# Altium PCB kernel.PcbDoc (part 6 of 7)
Units mil, origin at the board's own origin, x right, y up, seen from the top; angles counter-clockwise.
Board outline 2360 x 2450.34 mil, 6 copper layers (Top Layer, GND, SIGNAL, POWER, GND1, Bottom Layer), stack 32.112 mil thick; 150 components, 174 nets, 684 pads, 710 vias.
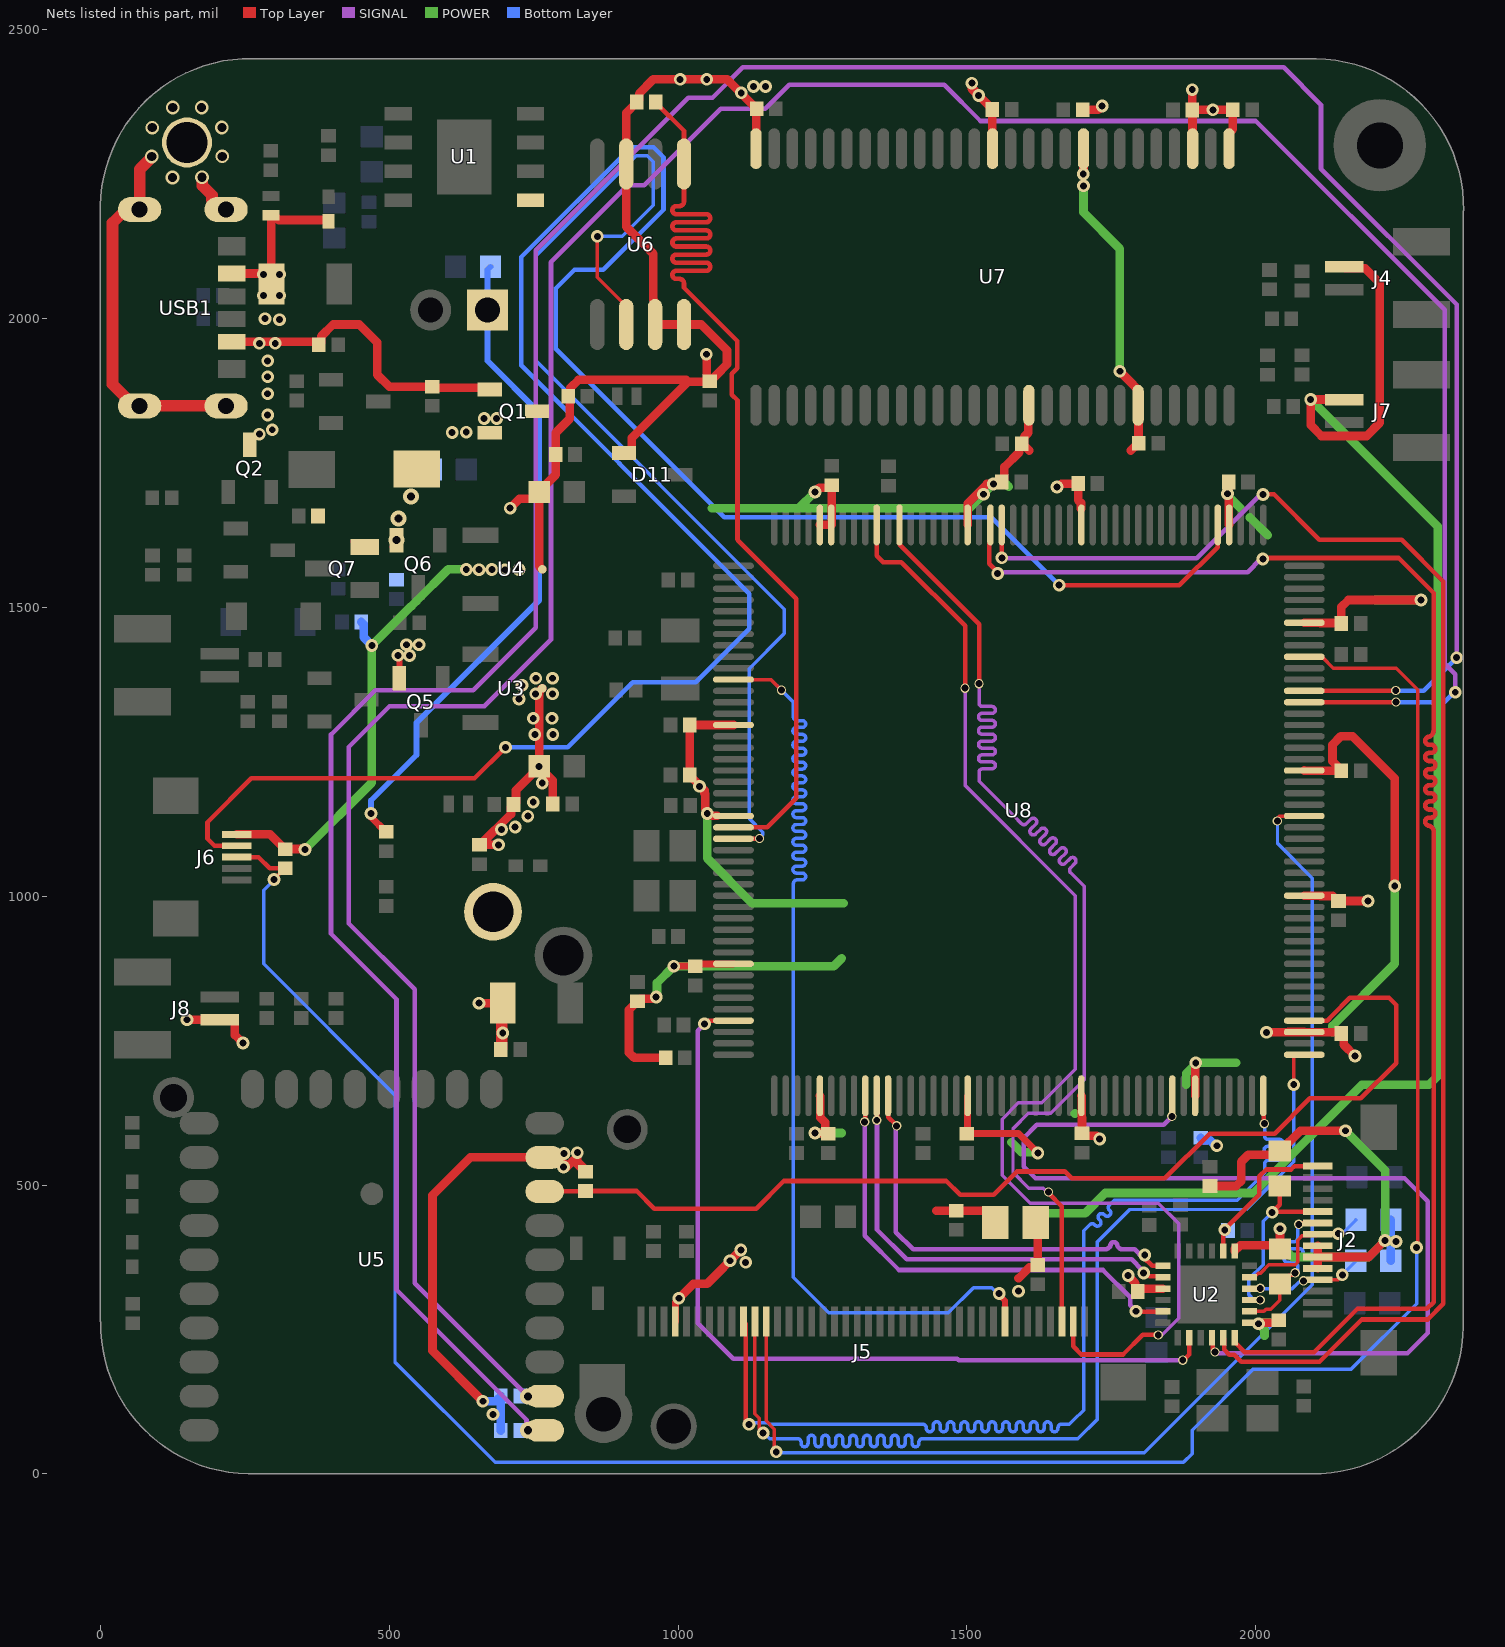
[diagram p9: the nets of this part, all layers, seen from the top]

## Via types
v1: diameter 22, hole 12, Top Layer to Bottom Layer, tented both sides, 583 vias
v2: diameter 16, hole 12, Top Layer to Bottom Layer, tented both sides, 111 vias
v3: diameter 23.62, hole 15.75, Top Layer to Bottom Layer, 8 vias
v4: diameter 28, hole 14, Top Layer to Bottom Layer, 5 vias
v5: diameter 22, hole 12, Top Layer to Bottom Layer, 3 vias

## Nets (pads, with @x,y where several pads share a name; then routed paths per layer and width w, separated by ;. In a path a pad name is that pad's centre, name@x,y a point inside that pad or via, vN(x,y) a via of type N, cw(c..) or ccw(c..) an arc to the next point about the centre after c; other vN are vias at no path point) (continued)
R5: J5.10 U8.88 | length 1951.3
  Top Layer w8: J5.10@1113.3,263.94 1117.09,260.16 1117.09,108.69 1117.17,108.61 1117.17,91.67 v1(1122.95,85.89) ; U8.88@2013.23,654.77 2013.81,654.19 2013.81,607.55 2015.18,606.18 v2@2015.18,605.1
  Bottom Layer w6: v1@1123.06,86 1125.94,88.88 1154.74,88.88 1157.62,86 1288.76,86 1423.76,86 cw(c1423.76,80) 1429.76,80 1429.76,78.92 ccw(c1435.76,78.92) 1441.76,78.92 1441.76,84.3 cw(c1447.76,84.3) 1453.76,84.3 1453.76,78.92 ccw(c1459.76,78.92) 1465.76,78.92 1465.76,84.3 cw(c1471.76,84.3) 1477.76,84.3 1477.76,78.92 ccw(c1483.76,78.92) 1489.76,78.92 1489.76,84.3 cw(c1495.76,84.3) 1501.76,84.3 1501.76,78.92 ccw(c1507.76,78.92) 1513.76,78.92 1513.76,84.3 cw(c1519.76,84.3) 1525.76,84.3 1525.76,78.92 ccw(c1531.76,78.92) 1537.76,78.92 1537.76,84.3 cw(c1543.76,84.3) 1549.76,84.3 1549.76,78.92 ccw(c1555.76,78.92) 1561.76,78.92 1561.76,84.3 cw(c1567.76,84.3) 1573.76,84.3 1573.76,78.92 ccw(c1579.76,78.92) 1585.76,78.92 1585.76,84.3 cw(c1591.76,84.3) 1597.76,84.3 1597.76,78.92 ccw(c1603.76,78.92) 1609.76,78.92 1609.76,84.3 cw(c1615.76,84.3) 1621.76,84.3 1621.76,78.92 ccw(c1627.76,78.92) 1633.76,78.92 1633.76,84.3 cw(c1639.76,84.3) 1645.76,84.3 1645.76,78.92 ccw(c1651.76,78.92) 1657.76,78.92 1657.76,80 cw(c1663.76,80) 1663.76,86 1677.56,86 1684.33,92.78 1702.06,110.51 1702.06,420.83 1712.67,431.44 cw(c1716.91,427.2) 1721.16,431.44 1721.88,430.71 ccw(c1726.13,434.96) 1730.37,430.71 ccw(c1726.13,434.96) 1730.37,439.2 1728.93,440.63 cw(c1733.18,444.88) 1737.42,449.12 1738.85,447.68 ccw(c1743.1,451.93) 1747.34,447.68 ccw(c1743.1,451.93) 1747.34,456.17 1746.61,456.9 cw(c1750.85,461.14) 1746.61,465.38 1753.36,472.13 1755.36,474.13 1968.17,474.13 2015.63,521.59 2015.63,522.05 2015.63,537.05 cw(c2021.63,537.05) 2021.63,543.05 2041.35,543.05 ccw(c2041.35,549.05) 2041.35,555.05 2020.63,555.05 cw(c2020.63,561.05) 2020.63,567.05 2041.35,567.05 ccw(c2041.35,573.05) 2041.35,579.05 2021.63,579.05 cw(c2021.63,585.05) 2015.63,585.05 2015.63,599.81 2015.63,604.65 v2@2015.18,605.1
  Bottom Layer w8: v1(1122.95,85.89) v1@1123.06,86
  other v2: 2014.93,606.43
R6: J5.11 U8.89 | length 1984
  Top Layer w6: J5.11@1132.99,263.94 1132.99,104.5 1140.95,96.54 1140.95,77.21 v1(1147.28,70.88) ; v1(2065.93,673.9) 2065.93,723.31 2068.25,725.63 U8.89@2084.09,725.63 2107.68,725.63 U8.89@2110,723.31
  Bottom Layer w6: v1(1147.28,70.88) 1149.12,70.88 1159.02,60.98 1192.05,60.98 1207.05,60.98 cw(c1207.05,54.98) 1213.05,54.98 1213.05,53 ccw(c1219.05,53) 1225.05,53 1225.05,60.98 cw(c1231.05,60.98) 1237.05,60.98 1237.05,53 ccw(c1243.05,53) 1249.05,53 1249.05,60.98 cw(c1255.05,60.98) 1261.05,60.98 1261.05,53 ccw(c1267.05,53) 1273.05,53 1273.05,60.98 cw(c1279.05,60.98) 1285.05,60.98 1285.05,53 ccw(c1291.05,53) 1297.05,53 1297.05,60.98 cw(c1303.05,60.98) 1309.05,60.98 1309.05,53 ccw(c1315.05,53) 1321.05,53 1321.05,60.98 cw(c1327.05,60.98) 1333.05,60.98 1333.05,53 ccw(c1339.05,53) 1345.05,53 1345.05,60.98 cw(c1351.05,60.98) 1357.05,60.98 1357.05,53 ccw(c1363.05,53) 1369.05,53 1369.05,60.98 cw(c1375.05,60.98) 1381.05,60.98 1381.05,53 ccw(c1387.05,53) 1393.05,53 1393.05,60.98 cw(c1399.05,60.98) 1405.05,60.98 1405.05,53 ccw(c1411.05,53) 1417.05,53 1417.05,54.98 cw(c1423.05,54.98) 1423.05,60.98 1448.66,60.98 1692.24,60.98 1725.4,94.14 1725.4,401.36 1781.8,457.77 1983.2,457.77 2065.93,540.5 v1(2065.93,673.9)
R7: J5.12 U8.110 | length 2161.7
  Top Layer w6: J5.12@1152.68,263.94 1152.68,91.76 1166.77,77.66 v1@1166.77,41.44 ; v2@2037.82,1130.17 2037.82,1134.71 2042.05,1138.94 2084,1138.94 U8.110@2084.09,1139.02
  Bottom Layer w6: v1@1166.77,41.44 1171.21,37 1807.46,37 2097.76,327.3 2097.76,1031.56 2037.82,1091.49 v2@2037.82,1130.17
  other v1: 1170.06,38.22
  other v2: 2037.57,1130.43
RMII_CRS_DV: U2.11 U8.53 | length 821.7
  Top Layer w8: v2@1323.4,609.33 1324.25,610.18 U8.53@1324.25,654.77 ; v1@1794.65,280.55 1838.6,280.55 U2.11@1839.42,281.38
  SIGNAL w8: v2@1323.4,609.33 1323.4,412.27 1382.6,353.07 1735.6,353.07 1782.89,305.78 1782.89,292.31 v1@1794.65,280.55
  other v1: 1792.97,281.57
  other v2: 1323.15,609.59
RMII_REF_CLK: U2.14 U8.41 | length 1485.9
  Top Layer w8: v1@1045,779.72 1045.61,779.11 1046.85,779.11 1052.43,784.69 U8.41@1095.91,784.69 ; v2@1874.04,196.72 1875.02,196.72 1884.99,206.69 U2.14@1884.99,235.81
  SIGNAL w8: v1@1045,778.34 1045,778.18 1034.24,767.42 1034.24,261.04 1095.63,199.65 1483.32,199.65 1486.25,196.72 v2@1874.04,196.72
  other v1: 1045.87,779.11
  other v2: 1873.79,196.97
RMII_RXD0: U2.8 U8.54 | length 761.4
  Top Layer w8: U8.54@1343.94,654.77 1344.47,654.24 1344.47,612.27 v2@1344.26,612.06 ; v1@1803.96,352.84 1805.04,352.84 1815.93,341.95 1837.91,341.95 U2.8@1839.42,340.44
  SIGNAL w8: v2@1344.26,612.06 1344.52,611.8 1344.52,563.83 1344.52,438.44 1344.52,422.82 1395.95,371.39 1785.41,371.39 v1@1803.96,352.84
  other v1: 1806.04,347.85
  other v2: 1344,612.32
RMII_RXD1: U2.7 U8.55 | length 740.5
  Top Layer w8: U8.55@1363.62,654.77 1364.2,654.19 1364.2,617.54 1376.44,605.3 v2@1376.44,602.91 ; v1@1803.96,375.47 1805.28,375.47 1820.64,360.12 U2.7@1839.42,360.12
  SIGNAL w8: v2@1376.44,602.91 1377.13,602.22 1377.13,564.44 1377.13,441.33 1377.13,418.65 1406.96,388.83 1718.67,388.83 1738.97,388.83 ccw(c1738.97,399.07) 1748.5,395.3 cw(c1754.5,395.32) 1760.5,395.32 ccw(c1770.03,399.07) 1770.03,388.83 1780.5,388.83 1784.5,388.83 1790.59,388.83 v1@1803.96,375.47
  other v1: 1808,379.17
  other v2: 1378.57,602.59
RMII_TX_EN: U2.16 U8.80 | length 1722.5
  Top Layer w8: v2@1851.99,617.57 1852.75,618.34 1852.75,621.04 1855.75,624.03 U8.80@1855.75,654.77 ; U2.16@1924.36,235.81 1925.77,234.39 1925.77,214.97 v2@1930,210.75
  SIGNAL w8: v2(1854.9,619.08) 1854.9,618.35 1840.82,604.28 1621.19,604.28 1598.52,581.6 1598.52,532.01 1618.9,511.62 2257.69,511.62 2297.59,471.72 2297.59,243.92 2262.87,209.2 1931.54,209.2 v2@1930,210.75
  other v2: 1929.75,211
RMII_TXD0: U2.17 U8.156 | length 2631.5
  Top Layer w8: U8.156@1560.47,1642.95 1560.24,1642.72 1560.24,1586.33 v1(1560.65,1585.92) ; U2.17@1944.05,235.81 1945.56,234.29 1945.56,215.43 1954.58,206.41 1962.64,206.41 1974.8,194.25 2110.46,194.25 2183.63,267.42 2297.71,267.42 2325,294.71 2325,1545 2252.55,1617.45 2110.11,1617.45 2031.8,1695.75 v1(2012.86,1695.75)
  SIGNAL w8: v1(1560.65,1585.92) 1564.08,1585.92 1565,1585 1898.14,1585 2008.89,1695.75 v1(2012.86,1695.75)
RMII_TXD1: U2.18 U8.157 | length 2633.5
  Top Layer w8: U8.157@1540.79,1642.95 1540.79,1612.21 1538.97,1610.39 1538.97,1575.43 1553.36,1561.04 v1(1553.36,1558.88) ; U2.18@1963.73,235.81 1965.24,234.29 1965.24,226.71 1981.19,210.77 2101,210.77 2176.22,285.99 2296.47,285.99 2308.05,297.56 2308.05,1110.22 2308.05,1114.22 ; v1(2012.32,1584.04) 2013.89,1585.6 2247.44,1585.6 2308.05,1524.99 2308.05,1316.95 2308.05,1287.38 cw(c2296.1,1287.33) 2300.51,1276.22 ccw(c2300.51,1269.22) 2300.51,1262.22 2304,1262.22 cw(c2304,1255.22) 2304,1248.22 2300.51,1248.22 ccw(c2300.51,1241.22) 2300.51,1234.22 2304,1234.22 cw(c2304,1227.22) 2304,1220.22 2300.51,1220.22 ccw(c2300.51,1213.22) 2300.51,1206.22 2304,1206.22 cw(c2304,1199.22) 2304,1192.22 2300.51,1192.22 ccw(c2300.51,1185.22) 2300.51,1178.22 2304,1178.22 cw(c2304,1171.22) 2304,1164.22 2300.51,1164.22 ccw(c2300.51,1157.22) 2300.51,1150.22 2304,1150.22 cw(c2304,1143.22) 2304,1136.22 2300.51,1136.22 ccw(c2300.51,1129.22) 2300.51,1122.22 ; 2300.54,1122.21 cw(c2296.56,1110.95) 2308.04,1114.26
  SIGNAL w8: v1(1553.36,1558.88) 1555.62,1561.14 1986.21,1561.14 2009.11,1584.04 v1(2012.32,1584.04)
SCK: U6.6 U8.25 | length 1912.8
  Top Layer w6: v1@860.3,2141.07 860.3,2071.69 910.3,2021.69 U6.6@910.3,1989.8
  Top Layer w8: U8.25@1095.91,1099.65 v2@1141.35,1099.65
  Bottom Layer w6: v1@861.78,2142.55 903.09,2142.55 956.96,2196.42 956.96,2271.77 946.87,2281.86 927.24,2281.86 755,2109.62 755,1926.48 1184.23,1497.26 1184.23,1454.99 1123.41,1394.17 1123.41,1134.67 1146.93,1111.14 1146.93,1106.17 1141.35,1100.58 v2@1141.35,1099.65
  other v1: 860.3,2142.55
  other v2: 1141.09,1099.91
SCL: J5.39 U8.167 | length 2124.8
  Top Layer w8: U8.167@1343.94,1642.95 1343.94,1589.56 1354.93,1578.57 1386.71,1578.57 1497.18,1468.09 v2@1497.18,1360 ; J5.39@1684.18,263.94 1684.18,220.78 1698.27,206.69 1770.27,206.69 1804.61,241.03 v2@1826.98,241.03
  SIGNAL w6: v2@1497.18,1360 1497.18,1191.77 1687.99,1000.96 1687.99,700.66 1629.73,642.4 1589.19,642.4 1561.05,614.27 1561.05,517.12 1609.73,468.44 1831.62,468.44 1866.56,433.5 1866.56,269.57 1838.02,241.03 v2@1826.98,241.03
  other v2: 1831.32,240.62 1496.93,1360.25
SDA: J5.38 U8.165 | length 2058.1
  Top Layer w8: U8.165@1383.31,1642.95 1383.89,1642.37 1383.89,1608.49 1521.15,1471.22 v2@1521.15,1367.84 ; v2@1641.82,485.63 1664.49,462.97 J5.38@1664.49,263.94
  SIGNAL w6: v2@1521.15,1367.84 1521.15,1355 1521.15,1334.67 ccw(c1527.15,1334.67) 1527.15,1328.67 1543.28,1328.67 cw(c1543.28,1322.67) 1543.28,1316.67 1526.15,1316.67 ccw(c1526.15,1310.67) 1526.15,1304.67 1543.28,1304.67 cw(c1543.28,1298.67) 1543.28,1292.67 1526.15,1292.67 ccw(c1526.15,1286.67) 1526.15,1280.67 1543.28,1280.67 cw(c1543.28,1274.67) 1543.28,1268.67 1526.15,1268.67 ccw(c1526.15,1262.67) 1526.15,1256.67 1543.28,1256.67 cw(c1543.28,1250.67) 1543.28,1244.67 1526.15,1244.67 ccw(c1526.15,1238.67) 1526.15,1232.67 1543.28,1232.67 cw(c1543.28,1226.67) 1543.28,1220.67 1527.15,1220.67 ccw(c1527.15,1214.67) 1521.15,1214.67 1521.15,1199.67 1521.15,1199.18 1581.19,1139.14 1594.68,1125.66 ccw(c1598.92,1129.9) 1603.16,1125.66 1610.86,1133.36 cw(c1615.11,1129.12) 1619.35,1133.36 cw(c1615.11,1129.12) 1619.35,1124.87 1610.94,1116.46 ccw(c1615.18,1112.22) 1610.94,1107.98 ccw(c1615.18,1112.22) 1619.42,1107.98 1627.83,1116.39 cw(c1632.08,1112.14) 1636.32,1107.9 1627.91,1099.49 ccw(c1632.15,1095.25) 1627.91,1091.01 ccw(c1632.15,1095.25) 1636.4,1091.01 1644.8,1099.42 cw(c1649.05,1095.17) 1653.29,1099.42 cw(c1649.05,1095.17) 1653.29,1090.93 1644.88,1082.52 ccw(c1649.12,1078.28) 1644.88,1074.04 ccw(c1649.12,1078.28) 1653.37,1074.04 1661.77,1082.45 cw(c1666.02,1078.2) 1670.26,1082.45 cw(c1666.02,1078.2) 1670.26,1073.96 1661.85,1065.55 ccw(c1666.09,1061.31) 1670.34,1057.07 1678.74,1065.48 cw(c1682.99,1061.23) 1687.23,1065.48 cw(c1682.99,1061.23) 1687.23,1056.99 1679.53,1049.29 ccw(c1683.77,1045.05) 1679.53,1040.8 1690.14,1030.2 1703.1,1017.23 1703.1,682.35 1645.08,624.33 1606.38,624.33 1579.92,597.87 1579.92,522.31 1607.35,494.88 1632.57,494.88 v2@1641.82,485.63
  other v2: 1641.42,487.92 1520.9,1368.09
SGND: M2固定孔.1 USB1.7 | length 725.6
  Top Layer w20: v3(88.98,2280.59) 88.98,2279.61 67.99,2258.62 USB1.7@67.99,2189.08 63.53,2184.62 39.86,2184.62 20.95,2165.71 20.95,1886.53 40.59,1866.89 58.55,1848.93 USB1.7@67.99,1848.93 USB1.7@217.6,1848.93 ; v3(175.98,2244.76) 176.67,2244.07 176.67,2230.01 193.2,2213.48 193.2,2206.09 210.21,2189.08 USB1.7@217.6,2189.08
  other v3: 124.8,2244.37 211.02,2280.98 89.76,2330.59 210.24,2330.98 125.2,2365.63 175.2,2365.63
SPEED: J2.14 R19.1 U2.2 | length 263.1
  Top Layer w8: U2.2@1944.05,386.01 1944.05,420.75 2006.44,483.14 2006.44,515.1 2018.31,526.98 2061.16,526.98 2067.14,532.95 J2.14@2107.24,532.95
  other v5: 1946.53,422.59
SPEEDA: 
SPEEDK: 
SPI_CS: R30.1 U6.1 U8.24 | length 1947.7
  Top Layer w8: R30.1@961.73,2375 961.73,2374.02 1010.3,2325.45 U6.1@1010.3,2267.76 1010.3,2220.36 1010.3,2202.86 cw(c1002.3,2202.86) 1002.3,2194.86 997.17,2194.86 ccw(c997.17,2187.86) 997.17,2180.86 1048.79,2180.86 cw(c1048.79,2173.86) 1048.79,2166.86 997.17,2166.86 ccw(c997.17,2159.86) 997.17,2152.86 1048.79,2152.86 cw(c1048.79,2145.86) 1048.79,2138.86 997.17,2138.86 ccw(c997.17,2131.86) 997.17,2124.86 1048.79,2124.86 cw(c1048.79,2117.86) 1048.79,2110.86 997.17,2110.86 ccw(c997.17,2103.86) 997.17,2096.86 1048.79,2096.86 cw(c1048.79,2089.86) 1048.79,2082.86 997.17,2082.86 ccw(c997.17,2075.86) 997.17,2068.86 1002.3,2068.86 cw(c1002.3,2060.86) 1010.3,2060.86 1010.3,2056.86 1010.3,2053.37 1102.35,1961.32 1102.35,1913.88 1093.21,1904.74 1093.21,1868.54 1102.91,1858.84 1102.91,1618.2 1103.3,1617.82 1103.3,1616.56 1141.34,1578.52 1204.8,1515.06 1204.8,1169.51 1154.63,1119.33 U8.24@1095.91,1119.33
SWDCLK: J6.2 U8.137 | length 4118.7
  Top Layer w8: J6.2@236.14,1087.53 197.48,1087.53 185.36,1099.65 185.36,1128.46 261.22,1204.32 647.73,1204.32 v1@700.54,1257.13 ; v1(1659.75,1538.57) 1663.83,1538.57 1664.01,1538.39 1867.97,1538.39 1934.17,1604.59 1934.17,1642.63 U8.137@1934.49,1642.95
  Bottom Layer w8: v1(701.19,1257.78) 809.09,1257.78 921.93,1370.63 1030.62,1370.63 1123.41,1463.42 1123.41,1523.96 1078.75,1568.61 898.64,1748.73 898.64,1749.23 728.88,1918.99 728.88,2106.68 919.06,2296.86 957.56,2296.86 974.8,2279.62 974.8,2188.43 870.84,2084.47 820.71,2084.47 788.42,2052.18 788.42,1947.69 1079.71,1656.4 1541.92,1656.4 v1(1659.75,1538.57)
SWDIO: J6.3 R45.2 U8.124 | length 4316.5
  Top Layer w6: v1(300.7,1029.22) 300.7,1029.95 R45.2@319.02,1048.27 ; U8.124@2084.09,1414.61 2114.84,1414.61 2134.53,1394.92 2243.05,1394.92 2280.72,1357.26 2280.72,1277.71 2280.51,1277.51 2280.51,680.31 2280.64,680.19 2280.64,394.14 v1(2278.59,392.08)
  Top Layer w8: J6.3@236.15,1067.84 273.73,1067.84 293.31,1048.27 R45.2@319.02,1048.27
  Bottom Layer w6: v1@300.7,1028.48 282.5,1010.28 282.5,883.01 510,655.51 510,193.66 683.66,20 1875.04,20 1890.04,35 1890.04,75.6 1996.02,181.57 2165.74,181.57 2278.68,294.52 2278.68,391.99 v1(2278.59,392.08)
TPRX_N: J2.4 R17.1 U2.22 | length 183.7
  Top Layer w6: v2@2078.57,333.9 2079,334.33 v2(2082.76,334.33) ; J2.4@2082.19,333.19 2104.33,333.19 J2.4@2107.24,336.1 2142.7,336.1 v1@2150,343.4
  Bottom Layer w6: v2(2007.9,321.35) 2008.88,320.36 2062.96,320.36 2074.74,332.13 ; v1@2150,343.4 v1(2150,344.64) 2173.31,367.95 R17.1@2173.31,368.93
TPRX_P: J2.8 R14.1 U2.23 | length 251.1
  Top Layer w6: U2.23@1989.62,340.44 1997.2,340.44 2004.37,347.6 2008.44,347.6 2022.9,362.07 2068.38,362.07 2072.65,366.34 2072.65,404.79 2079.79,411.93 2104.33,411.93 2107.43,415.03 v1@2143.99,415.03
  Bottom Layer w6: v1@2142,417.02 2143.99,415.03 2149.2,415.03 2173.43,439.27 R14.1@2173.43,440.25
  other v1: 2142.99,416.03
TPTX_N: J2.9 R9.1 U2.20 | length 337.2
  Top Layer w6: U2.20@1989.62,281.38 2014.4,281.38 2017.97,284.94 2026.42,284.94 2042.04,300.56 R9.1@2042.04,328.75 2057.15,343.86 2065.25,343.86 v2@2071.46,350.07 ; v2(2074.53,432.11) 2077.19,434.76 2107.01,434.76 J2.9@2107.24,434.53
  Bottom Layer w6: v2@2072.65,350.07 2072.65,357.09 2072.65,360.09 ccw(c2066.65,360.09) 2066.65,366.09 2055.11,366.09 cw(c2055.11,372.09) 2055.11,378.09 2076.03,378.09 ccw(c2076.03,384.09) 2076.03,390.09 2055.11,390.09 cw(c2055.11,396.09) 2055.11,402.09 2066.65,402.09 ccw(c2066.65,408.09) 2072.65,408.09 2072.65,420.86 2072.65,430.05 v2@2075.62,433.02
  other v2: 2068.35,348.2
TPTX_P: J2.10 R7.1 U2.21 | length 337.4
  Top Layer w6: U2.21@1989.62,301.07 1992.13,303.58 2007.77,303.58 v2(2007.77,300.97)
  Top Layer w8: R7.1@2041.74,498.67 2041.74,466.3 2026.89,451.44 2029.65,454.21 J2.10@2107.24,454.21
  Bottom Layer w6: v2(2007.77,300.97) 2007.06,301.67 1996.44,301.67 1988.38,309.74 1988.38,337.53 2013.19,362.35 2013.19,437.75 v1@2026.89,451.44
  other v1: 2028.54,452.83
VBAT: C6.2 J1.1 Q1.3 R52.2 U1.5 | length 1149.8
  Top Layer w12: v1(468.52,1143.39) 468.52,1137.23 494.02,1111.73 R52.2@495,1111.73
  Bottom Layer w10: v1(468.52,1143.39) 468.52,1165.6 547.33,1244.41 547.33,1300.29 759.69,1512.65 759.69,1837.29 670,1926.98 J1.1@670,2015 670,2084.69 C6.2@675.32,2090
VBUS: C8.2 D4.2 Q1.2 Q5.2 Q6.2 Q7.2 R24.2 R25.2 | length 70.9
  Top Layer w10: Q7.2@438.09,1613.66 Q7.2@446.87,1604.88 ; Q6.2@505.79,1604.88 512.6,1611.69 v4(512.6,1616.65) ; v1@512.92,1419.38 517.6,1414.7 Q5.2@517.6,1377.44
  other v1: 515.26,1417.04 535.24,1416.73 530,1435.45 551.73,1435.45 609.05,1803 633.38,1803.55 664.39,1827.29 686.09,1827.29
  other v4: 515.83,1653.86 537.52,1691.96
VCCEA: C2.2 C15.2 C16.2 J2.5 J2.6 J2.7 L1.2 R7.2 R9.2 R14.2 R17.2 U2.1 U2.19 | length 1287.2
  Top Layer w15: 1589.4,338.51 1608.16,357.27 1618.39,357.27 C2.2@1622.7,361.58 1622.7,432.1 L1.2@1619.53,435.27 ; C15.2@1921.02,498.39 1966.09,498.39 1974.88,507.18 1974.88,540.23 1985.64,550.99 1985.64,551.32 1986.98,552.66 2035.1,552.66 R7.2@2041.74,559.3 2042.73,559.3 2077.58,594.16 v1(2155.53,594.16) ; U2.1@1963.73,386.01 1963.73,389.61 1965.72,391.6 1969.32,391.6 1973.71,395.99 2035.43,395.99 R9.2@2042.04,389.38 2042.04,395.99 v1(2042.05,424.47) ; v1@2005.48,261.7 2034.66,261.7 2039.09,266.13 C16.2@2040.08,266.13 ; J2.5@2107.24,355.79 J2.6@2107.24,375.47 ; J2.7@2107.24,395.16 J2.6@2107.24,375.47 ; v1(2224.03,403.94) 2195.56,375.47 J2.6@2107.24,375.47
  POWER w15: 2015.18,239.36 2015.18,249.09 2005,259.27 v1(2005,260) 2005,260.52 2006.66,262.18 2006.82,262.02 2032.35,262.02 ; 2045.28,393.86 2063.67,375.47 2195.56,375.47 v1(2224.03,403.94) 2224.72,403.25 2242.36,403.25 v1(2243.05,402.56) ; v1(2155.53,594.16) 2224.36,525.33 2224.36,415.03
  Bottom Layer w15: R17.2@2233.94,368.93 2234,368.99 v1@2234,402.56 ; v1@2234,403.94 2234,440.19 R14.2@2234.06,440.25
  other v1: 1589.4,316.43
VCCM: C10.1 C11.1 C17.1 C30.2 C31.2 C32.2 C33.2 C34.2 C35.2 C36.2 C37.2 C38.2 C39.2 C40.2 C41.2 C42.2 C43.2 C44.2 C46.2 C47.2 C48.2 C49.2 C50.2 C51.2 C52.2 D11.1 J6.1 L2.1 R3.1 R23.2 R30.2 R45.1 R55.2 U4.2 U6.3 U6.7 U6.8 U7.1 U7.3 U7.9 U7.14 U7.27 U7.43 U7.49 U8.15 U8.23 U8.36 U8.49 U8.62 U8.72 U8.82 U8.91 U8.103 U8.114 U8.127 U8.136 U8.149 U8.159 U8.171 U8.172 | length 8123
  Top Layer w10: C36.2@1500,589.1 C36.2@1501.22,590.32 ; U8.62@1501.22,654.58 U8.62@1501.42,654.77
  Top Layer w12: v1(992.7,879.1) C30.2@1030,879.1 1033.53,882.62 1095.42,882.62 U8.36@1095.91,883.11 ; C36.2@1500,589.1 1589.4,589.1 v1(1622.94,555.56) ; C36.2@1501.22,590.32 U8.62@1501.22,654.58
  Top Layer w15: J6.1@236.14,1107.22 293.53,1107.22 319.02,1081.73 R45.1@320,1081.73 v1@356.65,1081.73 ; v1(709.3,1671.96) 725.54,1688.21 748.88,1688.21 C10.1@759.68,1699.02 ; U4.2@765,1565.9 759.68,1571.21 C10.1@759.68,1699.02 ; D11.1@906.38,1767.4 915.63,1767.4 919.94,1771.71 919.94,1793.43 1017.18,1890.67 ; v1(962.22,825.67) 959.13,822.58 934.31,822.58 R55.2@930,818.27 929.02,818.27 924.7,813.96 924.7,812.97 915.2,803.47 915.2,729.13 923.98,720.34 L2.1@978.46,720.34 ; v1@1049.7,1937.12 1049.7,1896.04 C17.1@1054.02,1891.73 ; U8.23@1067.98,1139.69 1058.11,1139.69 1046.98,1150.83 1046.98,1177.14 1045.72,1178.4 1045.72,1183.72 1020.35,1209.09 C35.2@1020.35,1210.08 C31.2@1020.36,1296.5 U8.15@1095.91,1296.5 ; U7.27@1135,2294.26 1135.51,2294.77 1135.51,2362.69 C48.2@1136.02,2363.2 1136.02,2364.18 1131.7,2368.49 1130.72,2368.49 1109.42,2389.79 v1(1109.42,2390.94) 1108.27,2390.94 1084.92,2414.29 v1(1049.7,2414.29) v1(1003.62,2414.29) 957.33,2414.29 932.58,2389.54 932.58,2379.31 R30.2@928.27,2375 928.27,2374.02 910.3,2356.05 U6.3@910.3,2267.76 910.3,2159.04 957.1,2112.25 957.1,2031.83 958.42,2030.5 958.42,1991.68 U6.7@960.3,1989.8 U6.8@1010.3,1989.8 1040.2,1989.8 1084.85,1945.15 1084.85,1921.13 1075.71,1911.99 1075.71,1911.46 1060.3,1896.04 1059.31,1896.04 1053.93,1890.67 1017.18,1890.67 ; v1(1237.16,590.33) C34.2@1257.78,590.33 ; v1(1237.16,1700) 1244.46,1707.3 1261.78,1707.3 C39.2@1266.09,1711.61 1266.09,1680.97 1265.87,1680.75 1265.87,1643.62 U8.171@1265.2,1642.95 U8.172@1245.51,1642.95 ; U8.49@1245.51,654.77 1246.19,654.09 1246.19,616.98 1254.7,608.46 1254.7,593.41 C34.2@1257.78,590.33 ; C34.2@1260,589.1 1258.76,590.33 C34.2@1257.78,590.33 ; U8.159@1501.42,1642.95 1501.42,1680.08 1534.95,1713.62 v1(1545.95,1713.62) 1556.95,1713.62 C40.2@1560.69,1717.36 1565.01,1721.67 1565.01,1743.34 1590.58,1768.91 1590.58,1779.15 C51.2@1594.89,1783.46 1599.2,1787.77 1599.2,1795.59 1606.19,1802.58 1606.19,1819.84 1606.54,1820.2 1606.54,1849.1 U7.43@1607.44,1850 ; 1513.42,2395.07 1508.6,2399.89 v1(1508.6,2407.77) 1508.6,2398.22 1543.96,2362.86 C46.2@1543.96,2361.87 1544.21,2361.63 1544.21,2294.5 U7.14@1544.45,2294.26 ; C51.2@1601.54,1778.16 1607.99,1771.71 ; v1(1656.07,1708.63) 1657.96,1708.63 1663.74,1714.4 C42.2@1692.58,1714.4 1692.58,1685.76 1697.59,1680.75 U8.149@1697.59,1670.89 ; U8.72@1698.27,654.77 1698.94,654.11 1698.94,616.98 1699.46,616.46 C33.2@1699.46,589.66 1703.77,585.35 1724.65,585.35 v1(1730,580) ; U7.9@1701.22,2294.97 U7.9@1701.93,2294.26 v1@1701.93,2250.51 ; C50.2@1701.22,2361.02 C50.2@1700.51,2361.73 1727.66,2361.73 v1(1734.19,2368.26) ; v1(1764.92,1908.91) 1788.26,1885.57 1788.26,1885.02 1796.42,1876.86 U7.49@1796.42,1850 1797.13,1849.29 1797.13,1782.72 1793.53,1779.12 1791.12,1779.12 1783.72,1771.71 ; v1(1890.24,2396.49) C49.2@1890.24,2361.24 ; U7.3@1890.91,2294.26 1890.58,2294.59 1890.58,2360.9 C49.2@1890.24,2361.24 ; U8.82@1895.12,654.77 1895.12,710.45 v1(1896.24,711.58) ; C43.2@1953.27,1717.36 1953.27,1682.07 1953.5,1681.83 1953.5,1643.62 U8.136@1954.17,1642.95 ; U7.1@1953.9,2294.26 1953.9,2321.12 1960.39,2327.6 C47.2@1960.39,2361.54 1960.23,2361.39 1890.39,2361.39 C49.2@1890.24,2361.24 ; v1(2018.79,764.44) 2056.16,764.44 2056.72,765 U8.91@2084.09,765 2084.27,764.82 2145.81,764.82 C37.2@2148.27,762.36 2152.58,758.05 2152.58,742.84 v1(2171.85,723.57) ; U8.103@2084.09,1001.22 2111.36,1001.22 2112.02,1000.55 2133.37,1000.55 2137.88,996.04 2138.87,996.04 C38.2@2143.18,991.73 v1(2194.48,991.73) ; U8.114@2084.09,1217.76 2084.28,1217.57 2143.96,1217.57 2144.17,1217.36 C41.2@2148.27,1217.36 2148.27,1218.35 2133.02,1233.59 2133.02,1262.56 2147.37,1276.91 2167.67,1276.91 2240.81,1203.78 v1(2240.81,1017.78) ; U8.127@2084.09,1473.66 2111.37,1473.66 2112.02,1473.01 2147.62,1473.01 C44.2@2148.27,1472.36 2148.27,1500.74 2160.56,1513.03 2284.99,1513.03 v1@2286.28,1511.75 ; C10.1@759.68,1699.02 759.68,1700.98 788.27,1729.57 C11.1@788.27,1765 788.27,1802.5 812.42,1826.65 812.42,1862.94 R3.1@809.65,1865.7 813.96,1870.01 813.96,1880.24 827.68,1893.96 1013.88,1893.96 1017.18,1890.67
  POWER w15: v1(354.37,1081.11) 470,1196.74 v1(470,1434.29) 538.1,1502.39 538.54,1502.39 547.33,1511.18 602.09,1565.94 633.18,1565.94 v1(633.38,1565.74) ; v1@961.84,825.29 v1(962.22,825.67) 963.56,827.01 963.56,849.96 v1(992.7,879.1) 1269.78,879.1 1283.34,892.65 ; v1(1050.58,1143.39) 1050.58,1065.68 1128.09,988.17 1286.76,988.17 ; 1058.11,1671.96 1209.12,1671.96 ; v1(1237.16,590.33) 1283.34,590.33 ; v1(1237.16,1700) 1209.12,1671.96 ; 1572.42,1708.96 1567.76,1713.62 v1(1545.95,1713.62) 1504.3,1671.96 1209.12,1671.96 ; 1577.31,574.15 1594.56,556.9 1621.6,556.9 v1(1622.94,555.56) ; 1686.79,624.01 1687.78,624.01 ; v1(1701.93,2230) 1701.93,2184.17 1764.92,2121.18 v1(1764.92,1908.91) ; v1(1730,580) v1@1730,580.8 ; 1879.88,673.9 1879.88,693.32 1896.24,709.68 v1(1896.24,711.58) 1965.93,711.58 ; v1@1932.71,568.1 v1(1932.79,568.1) ; v1(1951.18,1696.9) 1951.18,1694.66 1973.87,1671.96 ; 1990,1655.84 2020.84,1625 ; 2132.88,764.44 2132.88,775.44 2240.81,883.37 v1(2240.81,1017.78) ; v1(2171.85,723.57) v1@2171.85,725.47 ; 2206.01,1513.04 v1(2286.29,1513.04)
  Bottom Layer w15: R23.2@451.73,1475 456.04,1470.69 456.04,1448.25 v1(470,1434.29) ; C32.2@1905,581.73 1909.31,577.42 1921.57,577.42 1930.89,568.1 v1(1932.79,568.1)
  other v1: 1037.21,1190.38 655.59,1565.43 700.13,1565.26 677.76,1565.59 724.73,1565.74 1529,1695.96 1049.05,1938.36 1701.56,2250.51 1925.88,2361.49 1520.53,2386.29 1130.58,2401.99 1151.27,2401.75
VCCP: C1.2 C7.1 C9.1 C14.2 C20.2 C21.2 J4.2 J5.4 J7.2 J8.2 L1.1 pad.2 R2.1 R27.2 R28.2 R36.2 R49.1 U2.9 U3.2 U5.9 | length 4551.4
  Top Layer w12: J5.4@995.19,263.94 995.29,264.04 995.29,297.88 v1(1001.49,304.08)
  Top Layer w15: v1(149.77,786.3) J8.2@206.93,786.3 230.55,786.3 232.89,783.96 232.89,759.97 v1(246.92,745.95) ; v1(655.6,815) C21.2@696.34,815 696.34,804 694.8,802.46 C21.2@681.59,789.25 ; R49.1@656.44,1089.11 R49.1@657.42,1089.11 ; v1(662.17,125.88) 575,213.05 575,482.56 640.43,547.99 U5.9@769.21,547.99 774.47,542.73 785.73,553.98 801.63,538.08 v1(801.63,531.36) 807.25,531.36 819.01,543.12 838.78,523.34 R36.2@839.76,523.34 841.46,525.04 825.7,540.8 v1(825.7,556.16) ; v1(689.21,1089.11) R49.1@657.42,1089.11 ; C20.2@693.27,735 C20.2@694.8,736.54 ; U3.2@765,1360 759.68,1354.68 v1(759.68,1225) C7.1@759.68,1224.02 ; C9.1@783.27,1160 783.27,1200.43 C7.1@759.68,1224.02 ; v1(1001.49,304.08) 1026.78,329.38 1050.41,329.38 v1(1108.72,387.69) ; 1446.81,455.89 C1.2@1481.73,455.89 1534.12,455.89 1549.45,440.55 L1.1@1549.45,435.27 ; v1(1779.19,343.48) 1779.19,342.87 1784.44,337.62 1791.82,330.24 1791.82,319.99 C14.2@1796.13,315.68 1796.13,316.43 1800.44,320.75 U2.9@1839.42,320.75 ; J7.2@2153.07,1859.69 2150.93,1861.83 2149.04,1859.95 v1(2095.14,1859.95) 2095.14,1815.85 2114.01,1796.97 2192.13,1796.97 2215,1819.85 2215,2061.77 2189.43,2087.34 2155.41,2087.34 J4.2@2153.07,2089.69 ; R49.1@657.42,1089.11 710.76,1142.45 710.76,1154.39 R2.1@715.07,1158.7 719.38,1163.01 719.38,1183.71 C7.1@759.68,1224.02
  Top Layer w20: C20.2@694.8,736.54 C21.2@694.8,802.46
  POWER w15: 1618.56,451.44 1705,451.44 1739.78,486.22 1996.22,486.22 2183.9,673.9 2300,673.9 2315,688.9 2315,1640.08 v1(2095.14,1859.95)
  Bottom Layer w15: v1(662.17,125.88) 684.14,125.88 687.97,129.7 688.96,129.7 R27.2@693.27,134.02 ; v1@678.59,101.98 v1(679.86,103.24) 681.12,104.51 693.27,104.51 ; R28.2@693.27,75 693.27,104.51 ; R27.2@693.27,135 R27.2@693.27,134.02 ; 693.27,104.51 R27.2@693.27,134.02
  other v1: 1117.09,366.34 1090.14,369.1 802.72,554.89 696.57,763.16 694.5,1115.75 718.11,1120.06 740,1138.67 749.37,1163.01 764.99,1196.2 752.2,1280.02 783.27,1280.02 749.37,1308.02 781.7,1308.02 724.73,1341.56 753.5,1350.41 782.71,1350.41 730,1365.14 753.8,1377.42 782.71,1377.42
VSYNC: J5.33 U8.11 | length 1980.5
  Top Layer w6: U8.11@1095.91,1375.24 1160.36,1375.24 1179.1,1356.5 v2@1179.24,1356.5
  Top Layer w10: v1@1554.92,310.95 1566.07,299.81 J5.33@1566.07,263.94
  Bottom Layer w6: 1170.46,1365.14 1199.87,1335.73 1199.87,1313.29 1199.87,1310.29 ccw(c1205.87,1310.29) 1205.87,1304.29 1214.95,1304.29 cw(c1214.95,1298.29) 1214.95,1292.29 1204.87,1292.29 ccw(c1204.87,1286.29) 1204.87,1280.29 1214.95,1280.29 cw(c1214.95,1274.29) 1214.95,1268.29 1204.87,1268.29 ccw(c1204.87,1262.29) 1204.87,1256.29 1214.95,1256.29 cw(c1214.95,1250.29) 1214.95,1244.29 1204.87,1244.29 ccw(c1204.87,1238.29) 1204.87,1232.29 1214.95,1232.29 cw(c1214.95,1226.29) 1214.95,1220.29 1204.87,1220.29 ccw(c1204.87,1214.29) 1204.87,1208.29 1214.95,1208.29 cw(c1214.95,1202.29) 1214.95,1196.29 1204.87,1196.29 ccw(c1204.87,1190.29) 1204.87,1184.29 1214.95,1184.29 cw(c1214.95,1178.29) 1214.95,1172.29 1204.87,1172.29 ccw(c1204.87,1166.29) 1204.87,1160.29 1214.95,1160.29 cw(c1214.95,1154.29) 1214.95,1148.29 1204.87,1148.29 ccw(c1204.87,1142.29) 1204.87,1136.29 1214.95,1136.29 cw(c1214.95,1130.29) 1214.95,1124.29 1204.87,1124.29 ccw(c1204.87,1118.29) 1204.87,1112.29 1214.95,1112.29 cw(c1214.95,1106.29) 1214.95,1100.29 1204.87,1100.29 ccw(c1204.87,1094.29) 1204.87,1088.29 1214.95,1088.29 cw(c1214.95,1082.29) 1214.95,1076.29 1204.87,1076.29 ccw(c1204.87,1070.29) 1204.87,1064.29 1214.95,1064.29 cw(c1214.95,1058.29) 1214.95,1052.29 1204.87,1052.29 ccw(c1204.87,1046.29) 1204.87,1040.29 1214.95,1040.29 cw(c1214.95,1034.29) 1214.95,1028.29 1205.87,1028.29 ccw(c1205.87,1022.29) 1199.87,1022.29 1199.87,1011.04 1199.87,353.74 1199.26,353.12 1199.26,340.7 1261.22,278.73 1467.77,278.73 1511.57,322.53 1543.34,322.53 v1@1549.45,316.42
  other v1: 1555.98,312.36
  other v2: 1178.98,1356.76
VUSB: D3.2 D5.2 Q1.1 Q2.3 R1.1 R15.1 R18.1 USB1.A9 USB1.B9 | length 846.9
  Top Layer w15: USB1.A9@227.44,1959.95 373.96,1959.95 378.27,1955.64 R15.1@378.27,1955 382.58,1959.31 382.58,1969.54 402.84,1989.8 448.18,1989.8 479.39,1958.59 479.39,1902.87 499.87,1882.39 R1.1@574.37,1882.39 576.29,1880.47 671.18,1880.47 Q1.1@674.25,1877.4 ; USB1.B9@227.44,2078.06 281.59,2078.06 R18.1@295.67,2063.98 ; R18.1@296.34,2059.69 295.67,2060.35 R18.1@295.67,2063.98 ; D5.2@395,2168.75 393.1,2170.65 309.16,2170.65 300.91,2178.91 D3.2@295,2178.91 295.67,2178.24 R18.1@295.67,2063.98
  other v1: 275.18,1799.96 297.48,1807.67 289.52,1833.33 289.52,1870 289.52,1899.47 289.52,1926.98 275.18,1957.17 302.74,1957.17 310.24,1998.17 285,2000 282.5,2040 310.24,2040 282.5,2076.75 310.24,2076.75
WIFI_R: R27.1 U5.2 U8.120 | length 5108.6
  Top Layer w8: U8.120@2084.09,1335.87 v2@2244.81,1335.87
  SIGNAL w8: v4(740.02,134.15) 543.98,330.19 543.98,838.96 430,952.94 430,1258.52 500.48,1329.01 664.88,1329.01 780,1444.12 780,2097.62 913.28,2230.89 941.65,2230.89 1073.95,2363.2 1150.67,2363.2 1192.47,2405 1460.85,2405 1523.64,2342.21 2000,2342.21 2327.03,2015.17 2327.03,1402.76 2345.54,1384.25 v1(2345.54,1353.26)
  Bottom Layer w8: v2@2243.37,1335.92 2326.78,1335.92 2344.12,1353.26 v1(2345.54,1353.26)
  other v2: 2243.12,1336.17
WIFI_RST: R36.1 U5.8 U8.92 | length 1902
  Top Layer w8: U5.8@769.21,488.94 769.68,489.41 839.29,489.41 R36.1@839.76,489.88 928.23,489.88 958.71,459.4 1135.37,459.4 1183.06,507.08 1464.53,507.08 1488.47,483.14 1546.38,483.14 1586.9,523.66 1669.53,523.66 1681.58,511.62 1842.81,511.62 1920.29,589.1 2032.72,589.1 2093.67,650.05 2182.1,650.05 2243.05,711 2243.05,811.78 2230.76,824.06 2163.18,824.06 2133.64,794.52 2123.81,784.69 U8.92@2084.09,784.69
WIFI_T: R28.1 U5.1 U8.121 | length 5291.9
  Top Layer w8: U8.121@2084.09,1355.55 2084.49,1355.95 v2@2244.98,1355.95
  SIGNAL w8: v4(740.02,75.55) 737.62,77.96 737.62,93.91 512.6,318.93 512.6,821.96 399.25,935.31 399.25,1280.01 476.19,1356.95 645.78,1356.95 753.5,1464.67 753.5,1465.6 753.5,2118.11 1017.88,2382.49 1059.73,2382.49 1112.24,2435 2048.38,2435 2113,2370.38 2113,2259.55 2348.03,2024.52 v1(2348.03,1413.08)
  Bottom Layer w8: v2@2242.81,1356.04 2290.99,1356.04 v1(2348.03,1413.08)
  other v2: 2242.55,1356.29
pads on no net: J3.3 J3.4 J4.3 J4.4 J5.31 J6.5 J7.3 J7.4 J8.3 J8.4 U1.9 U2.10 U5.3 U5.4 U5.5 U5.6 U5.7 U5.11 U5.12 U5.13 U5.14 U5.15 U5.16 U5.17 U5.18 U5.19 U5.20 U5.23 U5.24 U5.25 U5.27 U5.29 U7.40 U8.1 U8.2 U8.7 U8.13 U8.40 U8.45 U8.46 U8.56 U8.79 U8.83 U8.84 U8.93 U8.94 U8.95 U8.100 U8.101 U8.107 U8.117 U8.118 U8.119 U8.122 U8.123 U8.134 U8.138 U8.141 U8.144 U8.145 U8.146 U8.147 U8.150 U8.151 U8.152 U8.161 U8.162 U8.163

## Polygon pours and split planes (outlines as drawn)
NetQ5_3 on Top Layer "NONET_L04_P-001" (solid, pour order 126): 541.59,1320.94 689.21,1320.94 689.21,1279.13 541.59,1279.13
GND on Top Layer "NONET_L04_P-001" (solid, pour order 122): 2033.57,1045 2033.57,934.48 2028.54,929.44 2011.69,929.44 2011.69,850.04 2031.38,850.04 2031.38,834.39 2020.48,823.48 1972.84,823.48 1972.84,1189.62 1999.79,1189.62 1999.79,1045
GND on Top Layer "NONET_L04_P-001" (solid, pour order 121): 1540,1153.62 1678.58,1153.62 1678.58,1061.18 1599.2,981.8 1599.84,981.16 1599.84,747.06 1575.7,747.06 1545.29,776.97 1487.32,776.97 1487.32,986.98 1442.36,1031.94 1408.92,1031.94 1408.92,918.48 1444.28,883.11 1444.28,745.32 1407.24,745.32 1365.53,787.03 1252.55,787.03 1212.59,747.06 1173.24,747.06 1173.24,753.94 1147.97,779.21 1147.97,812.97 1163.16,812.97 1338.14,987.95 1338.14,1153.62
GND on Top Layer "Top Layer-GND" (solid, pour order 120): 1301.3,1970 1495,1970 1495,1926.15 1301.3,1926.15
GND on Top Layer "Top Layer-GND 1" (solid, pour order 112): 1162.05,2220.36 1279.68,2220.36 1279.68,2179.81 1199.87,2100 1162.46,2100
VCCP on Top Layer "NONET_L04_P-001" (solid, pour order 108): 636.53,1016.63 730,1016.63 730,798.33 707.39,775.72 707.39,732.32 698.34,723.26 695.8,725.81 636.53,725.81
GND on Top Layer "NONET_L04_P-001" (solid, pour order 107): 733.14,636.58 841.46,636.58 841.46,589.1 733.71,589.1 733.14,589.66
GND on Top Layer "NONET_L04_P-001" (solid, pour order 106): 236.14,216.56 236.14,175 130.63,175 130.63,95.33 262.96,95.33 262.96,37.34 89.87,68.78 89.87,216.56
NetJ5_1 on Top Layer "NONET_L04_P-001" (solid, pour order 102): 855,326.08 943.07,326.08 943.07,238.71 855,238.71
no net on Top Layer "NONET_L04_P-001" (solid, pour order 99): 816.81,352.84
VCCM on Top Layer "NONET_L04_P-001" (solid, pour order 98): 1508.6,1676.8 1517.56,1685.76 1535.93,1685.76 1554.14,1703.96 1574,1703.96 1574,1738.76 1595.2,1759.96 1801,1759.96 1810,1768.96 1810,1822.46 1788.26,1822.46 1788.26,1815.85 1797.13,1806.98 1797.13,1794.54 1791.59,1794.54 1777.01,1779.96 1591.4,1779.96 1556.95,1745.51 1514.25,1702.38 1514.25,1692.91 1507.1,1685.76
VCCM on Top Layer "NONET_L04_P-001" (solid, pour order 96): 1688.58,2379.31 1746.84,2379.31 1746.84,2349.72 1711.59,2349.72 1711.59,2304.95 1688.58,2304.95
VCCM on Top Layer "NONET_L04_P-001" (solid, pour order 94): 1497.18,2420 1556.95,2420 1556.95,2319.85 1534.95,2319.85 1534.95,2349.72 1530.23,2354.44 1497.18,2354.44
GND on Top Layer "NONET_L04_P-001" (solid, pour order 91): 202.5,2141.07 154.73,2141.07 117.52,2103.86 89.76,2103.86 89.76,1937.91 131.62,1896.04 241.61,1896.04 241.61,1928.28 176.67,1928.28 176.67,2110 246.53,2110 246.53,2136.16 241.61,2141.07
no net on Top Layer "NONET_L04_P-001" (solid, pour order 90): 202.5,2141.07
VCCP on Top Layer "NONET_L04_P-001" (solid, pour order 89): 743.06,565.28 869.21,565.28 869.21,511.62 805,511.62 791.57,525.04 743.2,525.04
NetQ6_3 on Top Layer "NONET_L04_P-001" (solid, pour order 88): 537.91,1556.36 593.55,1556.36 619.67,1530.23 694.38,1530.23 694.38,1485.63 600.12,1485.63 578.24,1507.51 537.52,1507.51
VCCEA on Top Layer "NONET_L04_P-001" (solid, pour order 81): 1643.23,462.97 1643.23,354.09 1637.03,347.89 1603.89,347.89 1603.89,303.63 1580.16,303.58 1577.31,306.43 1577.31,462.97
VCCP on Top Layer "NONET_L04_P-001" (solid, pour order 72): 660.61,1372.99 684.51,1396.89 801.88,1396.89 827.54,1371.23 827.54,1321.38 802.71,1321.38 801.49,1322.6 795.78,1316.88 795.78,1252.02 787.12,1252.02 775.72,1240.62 775.72,1207.98 787.68,1196.02 788.27,1196.02 788.27,1168.69 697.84,1078.27 674.25,1078.27 672.55,1079.96 636.53,1079.96 636.53,1103.57 640.17,1107.22 666.2,1107.22 702.37,1143.39 702.37,1182.45 742.31,1222.39 742.31,1316.8 723.97,1335.15 672.47,1335.15 660.61,1347.01
GND on Top Layer "NONET_L04_P-001" (solid, pour order 70): 622.15,1699.02 683.56,1699.02 683.56,1654.58 689.21,1654.58 689.21,1611.69 622.15,1611.69
GND on Top Layer "NONET_L04_P-001" (solid, pour order 69): 602.45,1473.66 677.9,1473.66 689.21,1462.35 689.21,1408.55 627.2,1408.55 602.45,1433.3
GND on Top Layer "NONET_L04_P-001" (solid, pour order 68): 241.61,1315.03 402.84,1315.03 402.84,1257.78 241.61,1257.78
VCCP on Top Layer "NONET_L04_P-001" (solid, pour order 67): 1092.56,395.1 1260.84,395.1 1295.59,360.35 1295.59,360.12 1092.56,360.12
VCCM on Top Layer "VCCM_L01_P036" (solid, pour order 36): 713.51,1695.96 771.12,1753.57 771.12,1775.44 775.63,1779.96 797.5,1779.96 801.49,1775.96 801.49,1751.96 798.3,1751.96 795.78,1749.44 795.78,1725.61 779.12,1708.96 779.12,1679.45 775.63,1675.96 775.63,1603.03 728.76,1603.03 728.49,1656.99 721.52,1663.96 693.27,1663.96 693.27,1682.6 706.63,1695.96
GND on Top Layer "GND_L01_P029" (solid, pour order 29): 814.38,2325.45 814.83,2325 872.94,2325 872.94,2239.04 860.3,2226.4 856.21,2230.48 801.49,2230.48 801.49,2312.12 814.38,2325
VCCEA on Top Layer "VCCEA_L01_P028" (solid, pour order 28): 2134.53,399.48 2134.53,390.34 2138.87,386.01 2204.83,386.01 2212.76,393.93 2212.76,462.97 2255,462.97 2255,350.07 2219.22,350.07 2202.96,366.34 2134.24,366.34 2133.37,365.47 2133.37,350.07 2084.58,350.07 2082.4,352.25 2082.4,399.48
VCCP on Top Layer "VCCP_L01_P026" (solid, pour order 26): 1318.04,386.01 1398.33,466.3 1526.7,466.3 1526.7,445 1435.92,445 1351.03,360.12 1295.59,360.12 1284.88,370.83 1109.74,370.83 1038.29,299.37 999.73,299.37 999.73,341.99 1046.39,342.26 1090.14,386.01
VBUS on Top Layer "VBUS_L01_P025" (solid, pour order 25): 559.86,1446.5 568.71,1437.64 540.4,1409.33 538.3,1409.33 537.52,1408.55 537.52,1355.05 495.21,1355.03 495,1413.18 528.32,1446.5
VBAT on Top Layer "VBAT_L01_P022" (solid, pour order 22): 771.12,2216.91 771.12,2083.5 662.62,1975 636.53,1975 636.53,2132.63 720.81,2216.91
NetC4_1 on Top Layer "NETC4_1_L01_P020" (solid, pour order 20): 427.73,2097.47 487.46,2157.21 487.46,2215.15 537.58,2215.15 537.58,2125.3 454.8,2042.52 454.8,2010.54 388.98,2010.54 388.6,2010.15 388.6,2097.47
VBUS on Top Layer "VBUS_L01_P016" (solid, pour order 16): 647.73,1784.3 647.73,1711.61 587.4,1711.61 587.4,1779.3 592.4,1784.3
VBUS on Top Layer "VBUS_L01_P014" (solid, pour order 14): 654.39,1840 695.97,1840 695.97,1767.96 592.4,1767.96 592.4,1732.4 527.31,1667.31 527.31,1590.08 431.47,1590.08 431.47,1670 470.26,1708.79 504.67,1708.79 504.67,1779.03 540.32,1814.68 629.08,1814.68
VBAT on Top Layer "VBAT_L01_P012" (solid, remove dead copper, pour order 12): 636.53,2040 727.62,2040 727.62,1979.78 779.12,1928.28 779.12,1821.16 763.12,1821.16 713.98,1821.16 713.98,1894.05 636.53,1971.5
no net on Top Layer "NONET_L01_P011" (solid, pour order 11): 674.25,2089.53
VBUS on Top Layer "VBUS_L01_P009" (solid, pour order 9): 366.36,1670 530,1670 530,1590.08 431.47,1590.08 407.9,1613.66 384.88,1613.66 366.36,1632.18
VUSB on Top Layer "VUSB_L01_P004" (solid, pour order 4): 262.96,1815.86 257.06,1809.96 241.61,1809.96 241.61,1755.46 283.06,1755.46 311.9,1784.3 311.9,1975 303.99,1975 262.96,1933.97
VUSB on Top Layer "VUSB_L01_P002" (solid, pour order 2): 208.4,2060.35 268.27,2060.35 268.27,1959.95 333.14,1959.95 333.14,2169.57 313.62,2189.08 284.66,2189.08 284.66,2093.07 208.4,2093.07
VUSB on Top Layer "VUSB_L01_P001" (solid, pour order 1): 226.19,1975 311.9,1975 311.9,1938.34 204.1,1938.34 200.9,1941.53 200.9,1975
NetD4_1 on Top Layer "NETD4_1_L01_P000" (solid, pour order 0): 296.37,1718.06 327.42,1749.11 327.42,1755.46 405.3,1755.46 405.3,1708.79 349.32,1708.79 325.11,1684.57 284.66,1684.57 284.66,1718.06
GND on Bottom Layer "NONET_L04_P-001" (solid, pour order 123): 1641.42,1370.63 1761.17,1370.63 1763.71,1368.09 1763.71,1284.4 1753.36,1274.05 1636.53,1274.05 1636.29,1238.78 1640.75,1234.32 1770.06,1234.32 1770.06,964.26 1693.1,964.26 1693.1,1202.19 1677,1202.19 1547.18,1202.19 1547.18,1228.63 1618.56,1300.01 1618.56,1337.19 1632.46,1351.08 1641.42,1351.08
GND on Bottom Layer "Bottom Layer-GND" (solid, pour order 110): 1162.05,2220.36 1279.68,2220.36 1279.68,2179.81 1199.87,2100 1162.46,2100
VUSB on Bottom Layer "NONET_L04_P-001" (solid, pour order 87): 275.18,1976.84 200.9,1976.84 200.9,1939.03 202.44,1937.49 275.18,1937.49
VUSB on Bottom Layer "NONET_L04_P-001" (solid, pour order 86): 275.18,2097.82 200.9,2097.82 200.9,2060 202.44,2058.46 275.18,2058.46
VUSB on Bottom Layer "VUSB_L06_P031" (solid, pour order 31): 262.96,2097.82 318.4,2097.82 318.4,1790.36 262.96,1790.36
NetD4_1 on Bottom Layer "NETD4_1_L06_P030" (solid, pour order 30): 285,1720.74 300.7,1720.74 328.32,1748.73 328.32,1766.93 328.79,1767.4 405.98,1767.4 405.98,1710.91 403.86,1708.79 349.26,1708.79 320.47,1680 285,1680
VBUS on Bottom Layer "VBUS_L06_P027" (solid, pour order 27): 482.09,1760.36 590,1760.36 590,1701.03 580.18,1691.2 482.85,1691.2 482.09,1691.96
VBUS on Bottom Layer "VBUS_L06_P024" (solid, pour order 24): 580.18,1708.79 580.18,1691.2 537.52,1648.55 537.52,1582.37 571.58,1548.31 571.58,1439.27 537.52,1405.21 537.52,1355 495,1355 495,1412.57 537.52,1455.09 537.52,1532.53 495,1532.53 482.09,1545.44 482.09,1708.79
no net on POWER "NONET_L04_P-001" (solid, pour order 109): 1269.89,998.42
no net on POWER "NONET_L04_P-001" (solid, pour order 93): 1690.93,1938.36
VCCM on POWER "NONET_L04_P-001" (solid, pour order 92): 1402.99,1621.27 1402.99,1493.97 1262.09,1353.07 1262.09,677.11 1222.32,637.34 1222.32,578.11 1260.98,578.11 1269.89,587.02 1269.89,620.69 1312.6,663.4 1312.6,1335.02 1452.27,1474.7 1452.27,1621.27
VBUS on POWER "NONET_L04_P-001" (solid, pour order 84): 709.41,1866.63 709.3,1811.92 657.46,1811.92 625.49,1779.96 555.66,1710.12 555.66,1590.08 489.6,1590.08 489.6,1737.06 619.17,1866.63
VCCM on POWER "NONET_L04_P-001" (solid, pour order 82): 1602.14,1671.96 1654.49,1724.31 1670.15,1708.65 1670.15,1685.63 1623.66,1639.13
VCCP on POWER "NONET_L04_P-001" (solid, pour order 77): 660.63,632.46 660.63,485.63 807.46,485.63
VCCP on POWER "NONET_L04_P-001" (solid, pour order 75): 635.76,663.98 730,663.98 730,485.63 635.76,485.63
VCCP on POWER "NONET_L04_P-001" (solid, pour order 74): 740,1390 683.85,1390 683.85,1321.38 730,1321.38 730,1226.63 635.76,1132.4 635.76,738.33 633.18,735.75 229.97,735.75 229.97,663.98 730,663.98 730,1096.77 807.67,1174.44 807.67,1390 798.86,1390
VCCM on POWER "NONET_L04_P-001" (solid, pour order 71): 915.13,1616.65 978.48,1680 1041.63,1680 973.57,1616.65
VUSB on POWER "VUSB_L04_P066" (solid, pour order 66): 268.37,1821.21 249.8,1802.64 241.71,1802.64 241.71,1755.51 283.16,1755.51 333.23,1805.58 333.23,1975.04 304.09,1975.04 268.37,1939.32
VUSB on POWER "VUSB_L04_P065" (solid, pour order 65): 208.5,2060.4 268.37,2060.4 268.37,1959.99 333.23,1959.99 333.23,2169.61 313.72,2189.12 284.76,2189.12 284.76,2093.11 208.5,2093.11
VUSB on POWER "VUSB_L04_P064" (solid, pour order 64): 226.28,1975.04 311.99,1975.04 311.99,1938.38 204.19,1938.38 201,1941.58 201,1975.04
VCCM on POWER "VCCM_L04_P063" (solid, pour order 63): 1222.32,627.84 1264.67,627.84 1315.8,580.8 1380.68,580.8 1433.74,633.86 1681.8,633.86 1736.83,688.9 1849.08,688.9 1895.18,735 1970.45,735 2016.25,780.79 2108.71,780.79 2224.03,896.11 2224.03,977.63 2181.73,977.63 2181.73,1030 2255,1030 2255,883.61 2145.52,774.13 2183.9,735.75 2183.9,711.58 2160.48,711.58 2160.48,725.55 2139.81,745.95 2033.02,745.95 1989.59,702.52 1911.58,702.52 1896.24,687.19 1896.24,677.38 1922.4,651.22 1922.4,603.58 1946.43,579.55 1946.43,555.63 1916.36,555.63 1916.36,574.04 1896.24,594.16 1896.24,640.17 1879.19,657.22 1750.87,657.22 1713.28,619.63 1743.36,589.55 1743.36,568.1 1713.28,568.1 1713.28,583.39 1695.16,601.51 1581.37,601.51 1614.78,568.1 1634.66,568.1 1639.21,563.55 1639.21,543.66 1589.71,543.66 1531.86,601.51 1458.68,601.51 1400.84,543.66 1293.79,543.66 1258.94,578.51 1222.32,578.89
VCCEA on POWER "VCCEA_L04_P061" (solid, pour order 61): 1613.1,332.14 1789.2,156.03 1803.96,141.28 1915.67,141.27 2005.48,231.09 2005.48,248.21 2029.65,272.39 2029.65,402.03 2026.89,404.79 2026.89,437.77 2059.62,437.77 2059.62,234.71 1921.72,96.82 1802.44,96.82 1758.72,141.28 1743.02,141.28 1577.31,306.99 1577.31,332.13
VCCP on POWER "VCCP_L04_P060" (solid, pour order 60): 1171.32,399.48 1262.09,490.25 1589.82,490.25 1727.23,352.84 1794.65,352.84 1794.65,320.13 1697.16,320.13 1573.14,444.15 1291.15,444.15 1199.84,352.84 1171.32,352.84
VCCP on POWER "VCCP_L04_P059" (solid, pour order 59): 262.96,757.99 262.96,713.5 692.27,713.5 704.17,701.6 704.17,689.15 229.97,689.15 229.97,757.99
VCCP on POWER "VCCP_L04_P057" (solid, pour order 57): 877.69,572.31 994.5,455.5 994.5,344.18 1012.43,344.18 1067.73,399.48 1192.47,399.48 1192.47,352.84 1112.67,352.84 1029.82,270 906.55,270 906.55,412.42 816.33,502.64 816.33,572.31
no net on POWER "NONET_L04_P056" (solid, pour order 56): 865,554.78
VCCP on POWER "VCCP_L04_P055" (solid, pour order 55): 798.86,1195.2 798.86,1178.22 793.91,1194.46
VCCP on POWER "VCCP_L04_P053" (solid, pour order 53): 740,1371.5 740,1390 798.86,1390 798.86,1178.22
VCCP on POWER "VCCP_L04_P051" (solid, pour order 51): 740,1390 740,1321.38 753.5,1321.38 753.5,1193.58 665.22,1105.29 665.22,871.05 645,850.83 645,785 660.63,785 660.63,663.98 660.63,625.36 800.35,485.63 865,485.63 865,572.31 730,572.31 730,724.62 709.3,745.32 709.3,1088.66 798.86,1178.22
VCCM on POWER "VCCM_L04_P047" (solid, pour order 47): 1202.93,1680 1235.61,1712.68 1235.61,1713.62 1254.7,1713.62 1254.7,1691.58 1243.12,1680 1501.46,1680 1545.78,1724.31 1577.76,1724.31 1653.06,1649.01 1886.91,1649.01 1929.48,1691.58 1946.68,1708.79 1968.6,1708.79 2015.01,1662.38 2074.66,1662.38 2194.39,1542.65 2300,1542.65 2300,1501.12 2161.71,1501.12 2162.42,1501.12 2048.54,1615 1987.25,1615 1954.03,1648.21 1909.47,1603.65 1600.94,1603.65 1555.23,1649.36 1522.52,1616.65 1037.73,1616.65 1101.08,1680
VCCM on POWER "VCCM_L04_P043" (solid, pour order 43): 1639.21,2380 1869.66,2380 1869.66,2414.29 1908.33,2414.29 1908.33,2380 1946.43,2380 1946.43,2318.56 1639.21,2318.56
no net on POWER "NONET_L04_P041" (solid, pour order 41): 1721.74,2388.3
VCCM on POWER "VCCM_L04_P040" (solid, pour order 40): 1122.57,2450 1485.39,2450 1555.45,2379.94 1675.11,2379.94 1702.05,2406.87 1721.62,2406.87 1721.62,2379.94 1660.24,2318.56 1524.59,2318.56 1452.27,2390.88 1079.44,2390.88 1079.44,2406.87
VCCM on POWER "VCCM_L04_P039" (solid, pour order 39): 625,1616.65 962.22,1616.65 1220,1870.44 1220,1951.35 1119.02,2052.33 1079.55,2052.33 1079.55,2406.93 1086.91,2414.29 1151.27,2414.29 1151.27,2124.91 1285.16,1991.02 1285.16,1848.28 1053.52,1616.65 1026.65,1616.65 944.75,1534.75 625,1534.75
VCCM on POWER "VCCM_L04_P037" (solid, pour order 37): 625,1553.02 779.09,1553.02 1075,1848.93 1075,1945 1065,1955 1036.29,1955 1036.29,1848.93 804.01,1616.65 625,1616.65
no net on POWER "NONET_L04_P035" (solid, pour order 35): 625,1553.02
no net on POWER "NONET_L04_P034" (solid, pour order 34): 625,1553.02
GND on GND (split plane): 262.67,2430.26 262.67,2430.27 262.96,2430.24 2101.23,2430.24 2104.37,2429.93 2104.37,2429.92 2104.49,2429.92 2104.66,2429.9 2104.76,2429.91 2114.26,2429.65 2127.63,2428.52 2140.91,2426.64 2154.07,2424.03 2167.06,2420.67 2179.84,2416.6 2192.38,2411.82 2204.62,2406.34 2216.54,2400.18 2228.1,2393.36 2239.25,2385.91 2249.97,2377.84 2260.22,2369.19 2269.97,2359.97 2279.19,2350.22 2287.84,2339.97 2295.91,2329.25 2303.36,2318.1 2310.18,2306.54 2316.34,2294.62 2321.82,2282.38 2326.6,2269.84 2330.67,2257.06 2334.03,2244.07 2336.64,2230.91 2338.52,2217.63 2339.65,2204.26 2340.02,2190.85 2339.95,2190.62 2339.57,2186.7 2339.57,255.34 2339.57,255.24 2339.31,245.74 2338.18,232.37 2336.3,219.09 2333.69,205.93 2330.34,192.94 2326.26,180.16 2321.48,167.62 2316,155.38 2309.84,143.46 2303.02,131.9 2295.57,120.75 2287.5,110.03 2278.85,99.78 2269.63,90.03 2259.88,80.81 2249.63,72.16 2238.91,64.09 2227.76,56.64 2216.2,49.82 2204.28,43.66 2192.04,38.18 2179.5,33.4 2166.72,29.33 2153.73,25.97 2140.57,23.36 2127.29,21.48 2113.92,20.35 2100.51,19.98 2100.28,20.05 2096.36,20.43 255.68,20.43 255.58,20.43 246.08,20.69 232.71,21.82 219.43,23.7 206.27,26.31 193.28,29.66 180.5,33.74 167.96,38.52 155.72,44 143.8,50.16 132.24,56.98 121.09,64.43 110.37,72.5 100.12,81.15 90.37,90.37 81.15,100.12 72.5,110.37 64.43,121.09 56.98,132.24 50.16,143.8 44,155.72 38.52,167.96 33.74,180.5 29.66,193.28 26.31,206.27 23.7,219.43 21.82,232.71 20.69,246.08 20.32,259.49 20.41,263.01 20.43,263.3 20.1,266.73 20.1,2195 20.09,2195.09 20.35,2204.6 21.48,2217.97 23.36,2231.25 25.97,2244.41 29.33,2257.4 33.4,2270.18 38.18,2282.71 43.66,2294.96 49.82,2306.88 56.64,2318.43 64.09,2329.59 72.16,2340.31 80.81,2350.56 90.03,2360.31 99.78,2369.52 110.03,2378.18 120.75,2386.25 131.9,2393.7 143.46,2400.52 155.38,2406.67 167.62,2412.15 180.16,2416.94 192.94,2421.01 205.93,2424.36 219.09,2426.98 232.37,2428.86 245.74,2429.98 259.15,2430.36
GND on GND1 (split plane): 262.67,2430.26 262.67,2430.27 262.96,2430.24 2101.23,2430.24 2104.37,2429.93 2104.37,2429.92 2104.49,2429.92 2104.66,2429.9 2104.76,2429.91 2114.26,2429.65 2127.63,2428.52 2140.91,2426.64 2154.07,2424.03 2167.06,2420.67 2179.84,2416.6 2192.38,2411.82 2204.62,2406.34 2216.54,2400.18 2228.1,2393.36 2239.25,2385.91 2249.97,2377.84 2260.22,2369.19 2269.97,2359.97 2279.19,2350.22 2287.84,2339.97 2295.91,2329.25 2303.36,2318.1 2310.18,2306.54 2316.34,2294.62 2321.82,2282.38 2326.6,2269.84 2330.67,2257.06 2334.03,2244.07 2336.64,2230.91 2338.52,2217.63 2339.65,2204.26 2340.02,2190.85 2339.95,2190.62 2339.57,2186.7 2339.57,255.34 2339.57,255.24 2339.31,245.74 2338.18,232.37 2336.3,219.09 2333.69,205.93 2330.34,192.94 2326.26,180.16 2321.48,167.62 2316,155.38 2309.84,143.46 2303.02,131.9 2295.57,120.75 2287.5,110.03 2278.85,99.78 2269.63,90.03 2259.88,80.81 2249.63,72.16 2238.91,64.09 2227.76,56.64 2216.2,49.82 2204.28,43.66 2192.04,38.18 2179.5,33.4 2166.72,29.33 2153.73,25.97 2140.57,23.36 2127.29,21.48 2113.92,20.35 2100.51,19.98 2100.28,20.05 2096.36,20.43 255.68,20.43 255.58,20.43 246.08,20.69 232.71,21.82 219.43,23.7 206.27,26.31 193.28,29.66 180.5,33.74 167.96,38.52 155.72,44 143.8,50.16 132.24,56.98 121.09,64.43 110.37,72.5 100.12,81.15 90.37,90.37 81.15,100.12 72.5,110.37 64.43,121.09 56.98,132.24 50.16,143.8 44,155.72 38.52,167.96 33.74,180.5 29.66,193.28 26.31,206.27 23.7,219.43 21.82,232.71 20.69,246.08 20.32,259.49 20.41,263.01 20.43,263.3 20.1,266.73 20.1,2195 20.09,2195.09 20.35,2204.6 21.48,2217.97 23.36,2231.25 25.97,2244.41 29.33,2257.4 33.4,2270.18 38.18,2282.71 43.66,2294.96 49.82,2306.88 56.64,2318.43 64.09,2329.59 72.16,2340.31 80.81,2350.56 90.03,2360.31 99.78,2369.52 110.03,2378.18 120.75,2386.25 131.9,2393.7 143.46,2400.52 155.38,2406.67 167.62,2412.15 180.16,2416.94 192.94,2421.01 205.93,2424.36 219.09,2426.98 232.37,2428.86 245.74,2429.98 259.15,2430.36